# EAGLE board new_ATmega1280_breakout (EAGLE 5.11)
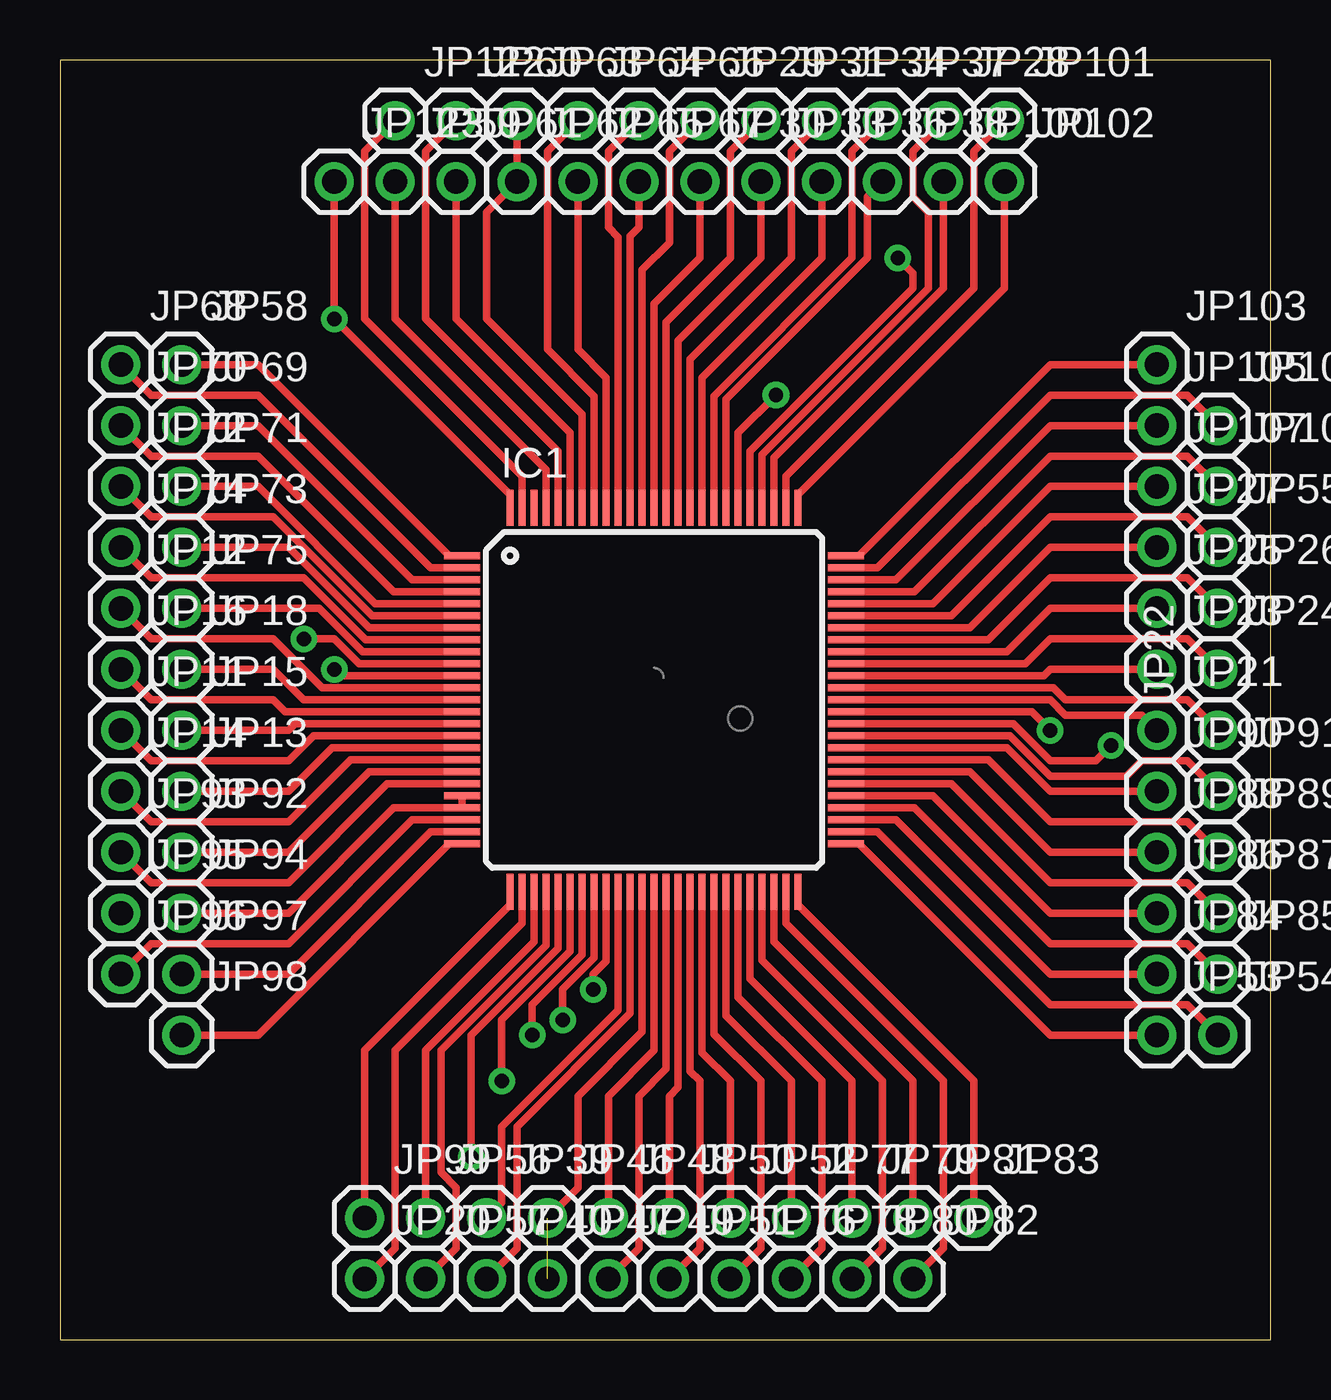
[diagram p0: board, top side]
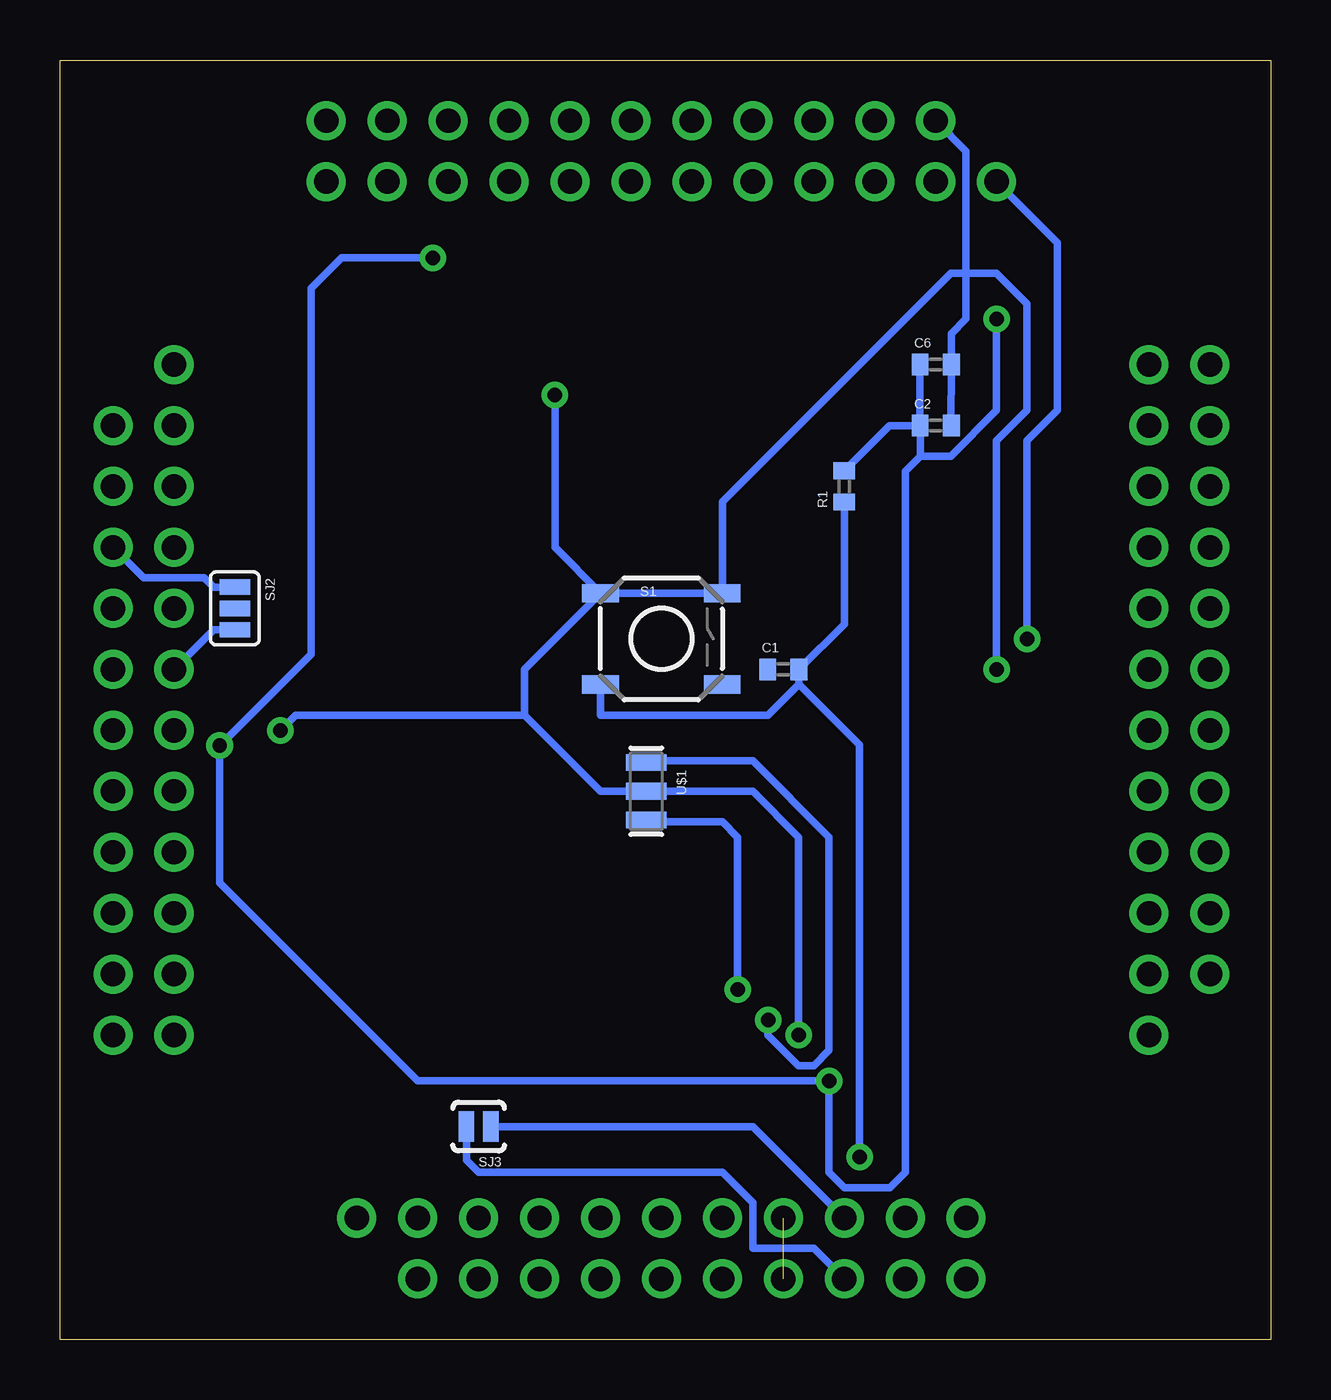
[diagram p1: board, bottom side, seen from below]

Size 50.47 x 53.33 mm. Coordinates in mm from the lower left corner, seen from the top.
Outline: 0,0 50.47,0 50.47,53.33 0,53.33 0,0
Copper layers (1*16): Top 0.035mm / dielectric 1.5mm / Bottom 0.035mm
Design rules "SparkFun": minimum track width 8mil, minimum drill 20mil, track to track 8mil, track to pad 8mil, pad to pad 8mil, via to via 8mil, smd to smd 8mil, copper to edge 10mil, drill to drill 8mil, minimum pad ring 12mil, minimum via ring 10mil, stop-mask expansion 4mil, vias tented up to drill 25mil, thermal gap 10mil

## Footprints (pad centres in the part's own frame; a part is rotated, then mirrored left to right if it is on the bottom)
C0402 = smd 0.7 x 0.9: 1 -0.65,0; 2 0.65,0
TQFP100 = smd 1.5 x 0.3: 1 -8,6; 2 -8,5.5; 3 -8,5; 4 -8,4.5; 5 -8,4; 6 -8,3.5; 7 -8,3; 8 -8,2.5; 9 -8,2; 10 -8,1.5; 11 -8,1; 12 -8,0.5; 13 -8,0; 14 -8,-0.5; 15 -8,-1; 16 -8,-1.5; 17 -8,-2; 18 -8,-2.5; 19 -8,-3; 20 -8,-3.5; 21 -8,-4; 22 -8,-4.5; 23 -8,-5; 24 -8,-5.5; 25 -8,-6; 51 8,-6; 52 8,-5.5; 53 8,-5; 54 8,-4.5; 55 8,-4; 56 8,-3.5; 57 8,-3; 58 8,-2.5; 59 8,-2; 60 8,-1.5; 61 8,-1; 62 8,-0.5; 63 8,0; 64 8,0.5; 65 8,1; 66 8,1.5; 67 8,2; 68 8,2.5; 69 8,3; 70 8,3.5; 71 8,4; 72 8,4.5; 73 8,5; 74 8,5.5; 75 8,6 | smd 0.3 x 1.5: 26 -6,-8; 27 -5.5,-8; 28 -5,-8; 29 -4.5,-8; 30 -4,-8; 31 -3.5,-8; 32 -3,-8; 33 -2.5,-8; 34 -2,-8; 35 -1.5,-8; 36 -1,-8; 37 -0.5,-8; 38 0,-8; 39 0.5,-8; 40 1,-8; 41 1.5,-8; 42 2,-8; 43 2.5,-8; 44 3,-8; 45 3.5,-8; 46 4,-8; 47 4.5,-8; 48 5,-8; 49 5.5,-8; 50 6,-8; 76 6,8; 77 5.5,8; 78 5,8; 79 4.5,8; 80 4,8; 81 3.5,8; 82 3,8; 83 2.5,8; 84 2,8; 85 1.5,8; 86 1,8; 87 0.5,8; 88 0,8; 89 -0.5,8; 90 -1,8; 91 -1.5,8; 92 -2,8; 93 -2.5,8; 94 -3,8; 95 -3.5,8; 96 -4,8; 97 -4.5,8; 98 -5,8; 99 -5.5,8; 100 -6,8
1X01 = drill 1.016 round: 1 0,0
TACTILE_SWITCH_SMD = smd 1.524 x 0.762: 1 -2.54,1.905; 2 2.54,1.905; 3 -2.54,-1.905; 4 2.54,-1.905
SJ_3 = smd 0.635 x 1.27: 1 -0.889,0; 2 0,0; 3 0.889,0
SJ_2S-NOTRACE = smd 0.635 x 1.27: 1 -0.508,0; 2 0.508,0
RESONATOR-SMD = smd 0.7 x 1.7: 1 -1.2,0; 2 0,0; 3 1.2,0

## Placement (x,y rotation side)
C1  .1uF  [C0402]  20.32,27.94 0 bottom
C2  .1uF  [C0402]  13.97,38.1 0 bottom
C6  .1uF  [C0402]  13.97,40.64 0 bottom
IC1  ATMEGA1280-16AU  [TQFP100]  24.77,26.67 0 top
JP11  M01PTH  [1X01]  2.54,25.4 0 top
JP12  M01PTH  [1X01]  2.54,30.48 0 top
JP13  M01PTH  [1X01]  5.08,22.86 0 top
JP14  M01PTH  [1X01]  2.54,22.86 0 top
JP15  M01PTH  [1X01]  5.08,25.4 0 top
JP16  M01PTH  [1X01]  2.54,27.94 0 top
JP18  M01PTH  [1X01]  5.08,27.94 0 top
JP20  M01PTH  [1X01]  12.7,2.54 0 top
JP21  M01PTH  [1X01]  45.72,25.4 0 top
JP22  M01PTH  [1X01]  48.26,25.4 90 top
JP23  M01PTH  [1X01]  45.72,27.94 0 top
JP24  M01PTH  [1X01]  48.26,27.94 0 top
JP25  M01PTH  [1X01]  45.72,30.48 0 top
JP26  M01PTH  [1X01]  48.26,30.48 0 top
JP27  M01PTH  [1X01]  45.72,33.02 0 top
JP28  M01PTH  [1X01]  36.83,50.8 0 top
JP29  M01PTH  [1X01]  26.67,50.8 0 top
JP30  M01PTH  [1X01]  26.67,48.26 0 top
JP31  M01PTH  [1X01]  29.21,50.8 0 top
JP33  M01PTH  [1X01]  29.21,48.26 0 top
JP34  M01PTH  [1X01]  31.75,50.8 0 top
JP36  M01PTH  [1X01]  31.75,48.26 0 top
JP37  M01PTH  [1X01]  34.29,50.8 0 top
JP38  M01PTH  [1X01]  34.29,48.26 0 top
JP39  M01PTH  [1X01]  17.78,5.08 0 top
JP40  M01PTH  [1X01]  17.78,2.54 0 top
JP46  M01PTH  [1X01]  20.32,5.08 0 top
JP47  M01PTH  [1X01]  20.32,2.54 0 top
JP48  M01PTH  [1X01]  22.86,5.08 0 top
JP49  M01PTH  [1X01]  22.86,2.54 0 top
JP50  M01PTH  [1X01]  25.4,5.08 0 top
JP51  M01PTH  [1X01]  25.4,2.54 0 top
JP52  M01PTH  [1X01]  27.94,5.08 0 top
JP53  M01PTH  [1X01]  45.72,12.7 0 top
JP54  M01PTH  [1X01]  48.26,12.7 0 top
JP55  M01PTH  [1X01]  48.26,33.02 0 top
JP56  M01PTH  [1X01]  15.24,5.08 0 top
JP57  M01PTH  [1X01]  15.24,2.54 0 top
JP58  M01PTH  [1X01]  5.08,40.64 0 top
JP59  M01PTH  [1X01]  13.97,48.26 0 top
JP60  M01PTH  [1X01]  16.51,50.8 0 top
JP61  M01PTH  [1X01]  16.51,48.26 0 top
JP62  M01PTH  [1X01]  19.05,48.26 0 top
JP63  M01PTH  [1X01]  19.05,50.8 0 top
JP64  M01PTH  [1X01]  21.59,50.8 0 top
JP65  M01PTH  [1X01]  21.59,48.26 0 top
JP66  M01PTH  [1X01]  24.13,50.8 0 top
JP67  M01PTH  [1X01]  24.13,48.26 0 top
JP68  M01PTH  [1X01]  2.54,40.64 0 top
JP69  M01PTH  [1X01]  5.08,38.1 0 top
JP70  M01PTH  [1X01]  2.54,38.1 0 top
JP71  M01PTH  [1X01]  5.08,35.56 0 top
JP72  M01PTH  [1X01]  2.54,35.56 0 top
JP73  M01PTH  [1X01]  5.08,33.02 0 top
JP74  M01PTH  [1X01]  2.54,33.02 0 top
JP75  M01PTH  [1X01]  5.08,30.48 0 top
JP76  M01PTH  [1X01]  27.94,2.54 0 top
JP77  M01PTH  [1X01]  30.48,5.08 0 top
JP78  M01PTH  [1X01]  30.48,2.54 0 top
JP79  M01PTH  [1X01]  33.02,5.08 0 top
JP80  M01PTH  [1X01]  33.02,2.54 0 top
JP81  M01PTH  [1X01]  35.56,5.08 0 top
JP82  M01PTH  [1X01]  35.56,2.54 0 top
JP83  M01PTH  [1X01]  38.1,5.08 0 top
JP84  M01PTH  [1X01]  45.72,15.24 0 top
JP85  M01PTH  [1X01]  48.26,15.24 0 top
JP86  M01PTH  [1X01]  45.72,17.78 0 top
JP87  M01PTH  [1X01]  48.26,17.78 0 top
JP88  M01PTH  [1X01]  45.72,20.32 0 top
JP89  M01PTH  [1X01]  48.26,20.32 0 top
JP90  M01PTH  [1X01]  45.72,22.86 0 top
JP91  M01PTH  [1X01]  48.26,22.86 0 top
JP92  M01PTH  [1X01]  5.08,20.32 0 top
JP93  M01PTH  [1X01]  2.54,20.32 0 top
JP94  M01PTH  [1X01]  5.08,17.78 0 top
JP95  M01PTH  [1X01]  2.54,17.78 0 top
JP96  M01PTH  [1X01]  2.54,15.24 0 top
JP97  M01PTH  [1X01]  5.08,15.24 0 top
JP98  M01PTH  [1X01]  5.08,12.7 0 top
JP99  M01PTH  [1X01]  12.7,5.08 0 top
JP100  M01PTH  [1X01]  36.83,48.26 0 top
JP101  M01PTH  [1X01]  39.37,50.8 0 top
JP102  M01PTH  [1X01]  39.37,48.26 0 top
JP103  M01PTH  [1X01]  45.72,40.64 0 top
JP104  M01PTH  [1X01]  48.26,38.1 0 top
JP105  M01PTH  [1X01]  45.72,38.1 0 top
JP106  M01PTH  [1X01]  48.26,35.56 0 top
JP107  M01PTH  [1X01]  45.72,35.56 0 top
JP122  M01PTH  [1X01]  13.97,50.8 0 top
JP123  M01PTH  [1X01]  11.43,48.26 0 top
R1  10k  [C0402]  17.78,35.56 90 bottom
S1  [TACTILE_SWITCH_SMD]  25.4,29.21 0 bottom
SJ2  [SJ_3]  43.18,30.48 270 bottom
SJ3  SOLDERJUMPERNC3  [SJ_2S-NOTRACE]  33.02,8.89 180 bottom
U$1  16MHZ  [RESONATOR-SMD]  26.04,22.86 270 bottom

## Library data of the parts
C1 C2 C6 JP11-JP16 JP18 JP20-JP31 JP33 JP34 JP36-JP40 JP46-JP107 JP122 JP123 R1 S1 SJ2 SJ3 U$1 = DIYdrones3
IC1 = atmel-2010

## Nets
#RST: C1.1
AREF: IC1.98
GND: C2.2 C6.2 IC1.11 IC1.32 IC1.62 IC1.81 IC1.99 JP122.1 S1.1 S1.2 U$1.2
MUX: IC1.1 JP58.1
N$12: SJ2.2
N$56: IC1.34 U$1.3
N$89: IC1.33 U$1.1
PA0: IC1.78 JP100.1
PA1: IC1.77 JP101.1
PA2: IC1.76 JP102.1
PA3: IC1.75 JP103.1
PA4: IC1.74 JP104.1
PA5: IC1.73 JP105.1
PA6: IC1.72 JP106.1
PA7: IC1.71 JP107.1
PB0: IC1.19 JP92.1
PB1: IC1.20 JP93.1
PB2: IC1.21 IC1.22 JP94.1
PB4: IC1.23 JP96.1
PB5: IC1.24 JP97.1
PB6: IC1.25 JP98.1
PB7: IC1.26 JP99.1
PC0: IC1.53 JP84.1
PC1: IC1.54 JP85.1
PC2: IC1.55 JP86.1
PC3: IC1.56 JP87.1
PC4: IC1.57 JP88.1
PC5: IC1.58 JP89.1
PC6: IC1.59 JP90.1
PC7: IC1.60 JP91.1
PD0: IC1.43 JP76.1
PD1: IC1.44 JP77.1
PD2: IC1.45 JP78.1
PD3: IC1.46 JP79.1
PD4: IC1.47 JP80.1
PD5: IC1.50 JP83.1
PD6: IC1.49 JP82.1
PD7: IC1.48 JP81.1
PE0: IC1.2 JP68.1
PE1: IC1.3 JP69.1
PE2: IC1.4 JP70.1
PE3: IC1.5 JP71.1
PE4: IC1.6 JP72.1
PE5: IC1.7 JP73.1
PE6: IC1.8 JP74.1
PE7: IC1.9 JP75.1
PF0: IC1.97 JP59.1
PF1: IC1.96 JP60.1
PF2: IC1.95 JP61.1
PF3: IC1.94 JP62.1 JP63.1
PF4: IC1.93 JP64.1
PF5: IC1.92 JP65.1
PF6: IC1.91 JP66.1
PF7: IC1.90 JP67.1
PG0: IC1.51 JP53.1
PG1: IC1.52 JP54.1
PG2: IC1.70 JP55.1 SJ2.1
PG3: IC1.28 JP56.1
PG4: IC1.29 JP57.1
PH0: IC1.12 JP12.1
PH1: IC1.13 JP18.1
PH2: IC1.14 JP16.1
PH3: IC1.15 JP15.1
PH4: IC1.16 JP11.1
PH5: IC1.17 JP13.1
PH6: IC1.18 JP14.1
PH7: IC1.27 JP20.1
PJ0: IC1.63 JP21.1
PJ1: IC1.64 JP22.1
PJ2: IC1.65 JP23.1 SJ2.3
PJ3: IC1.66 JP24.1
PJ4: IC1.67 JP25.1
PJ5: IC1.68 JP26.1
PJ6: IC1.69 JP27.1
PJ7: IC1.79 JP28.1
PK0: IC1.89 JP29.1
PK1: IC1.88 JP30.1
PK2: IC1.87 JP31.1
PK3: IC1.86 JP33.1
PK4: IC1.85 JP34.1
PK5: IC1.84 JP36.1
PK6: IC1.83 JP37.1
PK7: IC1.82 JP38.1
PL0: IC1.35 JP39.1 SJ3.1
PL1: IC1.36 JP40.1 SJ3.2
PL2: IC1.37 JP46.1 JP47.1
PL3: IC1.38 JP48.1
PL4: IC1.39 JP49.1
PL5: IC1.40 JP50.1
PL6: IC1.41 JP51.1
PL7: IC1.42 JP52.1
RST: C1.2 IC1.30 R1.1 S1.3
VCC: C2.1 C6.1 IC1.10 IC1.31 IC1.61 IC1.80 IC1.100 JP123.1 R1.2

## Tracks (layer width: path | path; a pad name or v marks a point on that pad's centre or on a via)
GND  (via drill 0.6)
  Top 0.305: IC1.99 19.27,35.98 12.7,42.55 12.7,49.53 JP122.1 | IC1.32 21.77,16.05 19.68,13.97 v19.68,12.7 | IC1.11 11.7,27.67 v11.43,27.94 | IC1.62 40.51,26.17 v41.28,25.4 | IC1.81 28.27,37.79 v29.84,39.37
  Bottom 0.305: C2.2 13.33,38.1 C6.2 13.32,41.93 12.7,42.55 12.7,44.45 | S1.1 S1.2 22.86,34.93 13.33,44.45 12.7,44.45 | 12.7,44.45 12.7,49.53 JP122.1 | v19.68,12.7 19.68,20.95 21.59,22.86 U$1.2 27.94,22.86 31.11,26.04 | v11.43,27.94 11.43,37.47 10.16,38.74 10.16,43.18 11.43,44.45 12.7,44.45 | v41.28,25.4 40.64,26.04 31.11,26.04 | 31.11,26.04 31.11,27.94 S1.1 | v29.84,39.37 29.84,33.02 S1.1
MUX
  Top 0.305: IC1.1 16.23,32.67 8.26,40.64 JP58.1
N$56  (via drill 0.6)
  Top 0.305: IC1.34 22.77,15.78 22.22,15.24 v22.22,14.61
  Bottom 0.305: v22.22,14.61 22.22,20.95 22.86,21.59 25.96,21.59 U$1.3
N$89  (via drill 0.6)
  Top 0.305: IC1.33 22.27,15.91 20.95,14.61 v20.95,13.33
  Bottom 0.305: v20.95,13.33 20.95,12.7 19.68,11.43 19.05,11.43 18.41,12.06 18.41,20.95 21.59,24.13 25.96,24.13 U$1.1
PA0
  Top 0.305: IC1.78 29.77,36.75 36.83,43.82 JP100.1
PA1
  Top 0.305: IC1.77 30.27,35.98 38.1,43.82 38.1,49.53 JP101.1
PA2
  Top 0.305: IC1.76 30.77,35.21 39.37,43.82 JP102.1
PA3
  Top 0.305: IC1.75 33.3,32.67 41.28,40.64 JP103.1
PA4
  Top 0.305: IC1.74 34.08,32.17 41.28,39.37 46.99,39.37 JP104.1
PA5
  Top 0.305: IC1.73 34.85,31.67 41.28,38.1 JP105.1
PA6
  Top 0.305: IC1.72 35.62,31.17 41.28,36.83 46.99,36.83 JP106.1
PA7
  Top 0.305: IC1.71 36.39,30.67 41.28,35.56 JP107.1
PB0
  Top 0.305: IC1.19 12.88,23.67 9.53,20.32 JP92.1
PB1
  Top 0.305: IC1.20 13.64,23.17 9.53,19.05 3.81,19.05 JP93.1
PB2
  Top 0.305: JP94.1 9.53,17.78 13.91,22.17 IC1.22 IC1.21
PB4
  Top 0.305: IC1.23 14.68,21.67 9.53,16.51 3.81,16.51 JP96.1
PB5
  Top 0.305: IC1.24 15.46,21.17 9.53,15.24 JP97.1
PB6
  Top 0.305: IC1.25 16.23,20.67 8.26,12.7 JP98.1
PB7
  Top 0.305: IC1.26 18.77,18.13 12.7,12.06 JP99.1
PC0
  Top 0.305: IC1.53 34.85,21.67 41.28,15.24 JP84.1
PC1
  Top 0.305: IC1.54 35.62,22.17 41.28,16.51 46.99,16.51 JP85.1
PC2
  Top 0.305: IC1.55 36.39,22.67 41.28,17.78 JP86.1
PC3
  Top 0.305: IC1.56 37.16,23.17 41.28,19.05 46.99,19.05 JP87.1
PC4
  Top 0.305: IC1.57 37.93,23.67 41.28,20.32 JP88.1
PC5
  Top 0.305: IC1.58 38.7,24.17 41.28,21.59 46.99,21.59 JP89.1
PC6
  Top 0.305: IC1.59 39.47,24.67 41.28,22.86 JP90.1
PC7
  Top 0.305: IC1.60 39.6,25.17 41.28,23.5 44.45,23.5 45.09,24.13 46.99,24.13 JP91.1
PD0
  Top 0.305: IC1.43 27.27,12.74 29.21,10.79 29.21,3.81 JP76.1
PD1
  Top 0.305: IC1.44 27.77,13.51 30.48,10.79 JP77.1
PD2
  Top 0.305: IC1.45 28.27,14.28 31.75,10.79 31.75,3.81 JP78.1
PD3
  Top 0.305: IC1.46 28.77,15.05 33.02,10.79 JP79.1
PD4
  Top 0.305: IC1.47 29.27,15.82 34.29,10.79 34.29,3.81 JP80.1
PD5
  Top 0.305: IC1.50 30.77,18.13 38.1,10.79 JP83.1
PD6
  Top 0.305: IC1.49 30.27,17.36 36.83,10.79 36.83,3.81 JP82.1
PD7
  Top 0.305: IC1.48 29.77,16.59 35.56,10.79 JP81.1
PE0
  Top 0.305: IC1.2 15.46,32.17 8.26,39.37 3.81,39.37 JP68.1
PE1
  Top 0.305: IC1.3 14.68,31.67 8.26,38.1 JP69.1
PE2
  Top 0.305: IC1.4 13.91,31.17 8.26,36.83 3.81,36.83 JP70.1
PE3
  Top 0.305: IC1.5 13.14,30.67 8.26,35.56 JP71.1
PE4
  Top 0.305: IC1.6 13.01,30.17 8.89,34.29 3.81,34.29 JP72.1
PE5
  Top 0.305: IC1.7 12.88,29.67 9.53,33.02 JP73.1
PE6
  Top 0.305: IC1.8 12.74,29.17 10.16,31.75 3.81,31.75 JP74.1
PE7
  Top 0.305: IC1.9 12.61,28.67 10.79,30.48 JP75.1
PF0
  Top 0.305: IC1.97 20.27,36.25 13.97,42.55 JP59.1
PF1
  Top 0.305: IC1.96 20.77,37.02 15.24,42.55 15.24,49.53 JP60.1
PF2
  Top 0.305: IC1.95 21.27,37.79 16.51,42.55 JP61.1
PF3
  Top 0.305: IC1.94 21.77,38.56 17.78,42.55 17.78,46.99 JP62.1 JP63.1
PF4
  Top 0.305: IC1.93 22.27,39.33 20.32,41.28 20.32,49.53 JP64.1
PF5
  Top 0.305: IC1.92 22.77,40.1 21.59,41.28 JP65.1
PF6
  Top 0.305: IC1.91 23.27,45.95 22.86,46.36 22.86,49.53 JP66.1
PF7
  Top 0.305: IC1.90 23.77,45.99 24.13,46.36 JP67.1
PG0
  Top 0.305: IC1.51 33.3,20.67 41.28,12.7 JP53.1
PG1
  Top 0.305: IC1.52 34.08,21.17 41.28,13.97 46.99,13.97 JP54.1
PG2
  Top 0.305: IC1.70 37.16,30.17 41.28,34.29 46.99,34.29 JP55.1
  Bottom 0.305: SJ2.1 44.07,31.37 44.45,31.75 46.99,31.75 JP55.1
PG3
  Top 0.305: IC1.28 19.77,16.59 15.24,12.06 JP56.1
PG4
  Top 0.305: IC1.29 20.27,16.46 15.88,12.06 15.88,6.98 16.51,6.35 16.51,3.81 JP57.1
PH0
  Top 0.305: IC1.12 10.93,27.17 8.89,29.21 3.81,29.21 JP12.1
PH1
  Top 0.305: IC1.13 10.16,26.67 8.89,27.94 JP18.1
PH2
  Top 0.305: IC1.14 9.39,26.17 8.89,26.67 3.81,26.67 JP16.1
PH3
  Top 0.305: IC1.15 9.79,25.67 9.53,25.4 JP15.1
PH4
  Top 0.305: IC1.16 10.56,25.17 9.53,24.13 3.81,24.13 JP11.1
PH5
  Top 0.305: IC1.17 11.33,24.67 9.53,22.86 JP13.1
PH6
  Top 0.305: IC1.18 12.11,24.17 9.53,21.59 3.81,21.59 JP14.1
PH7
  Top 0.305: IC1.27 19.27,17.36 13.97,12.06 13.97,3.81 JP20.1
PJ0
  Top 0.305: IC1.63 41.28,26.67 41.91,26.04 45.09,26.04 JP21.1
PJ1
  Top 0.305: IC1.64 41.41,27.17 41.91,26.67 46.99,26.67 JP22.1
PJ2
  Top 0.305: IC1.65 41.01,27.67 41.28,27.94 JP23.1
  Bottom 0.305: SJ2.3 44.07,29.59 JP23.1
PJ3
  Top 0.305: IC1.66 40.24,28.17 41.28,29.21 46.99,29.21 JP24.1
PJ4
  Top 0.305: IC1.67 39.47,28.67 41.28,30.48 JP25.1
PJ5
  Top 0.305: IC1.68 38.7,29.17 41.28,31.75 46.99,31.75 JP26.1
PJ6
  Top 0.305: IC1.69 37.93,29.67 41.28,33.02 JP27.1
PJ7
  Top 0.305: IC1.79 29.27,36.89 36.2,43.82 36.2,46.99 35.56,47.62 35.56,49.53 JP28.1
PK0
  Top 0.305: IC1.89 24.27,44.59 25.4,45.72 25.4,49.53 JP29.1
PK1
  Top 0.305: IC1.88 24.77,43.18 26.67,45.09 JP30.1
PK2
  Top 0.305: IC1.87 25.27,42.41 27.94,45.09 27.94,49.53 JP31.1
PK3
  Top 0.305: IC1.86 25.77,41.64 29.21,45.09 JP33.1
PK4
  Top 0.305: IC1.85 26.27,40.87 30.48,45.09 30.48,49.53 JP34.1
PK5
  Top 0.305: IC1.84 26.77,40.1 31.75,45.09 JP36.1
PK6
  Top 0.305: IC1.83 27.27,39.33 33.02,45.09 33.02,49.53 JP37.1
PK7
  Top 0.305: IC1.82 27.77,39.2 33.66,45.09 33.66,47.62 JP38.1
PL0
  Top 0.305: IC1.35 23.27,13.74 18.41,8.89 18.41,5.71 JP39.1
  Bottom 0.305: SJ3.1 21.59,8.89 JP39.1
PL1
  Top 0.305: IC1.36 23.77,13.61 19.05,8.89 19.05,3.81 JP40.1
  Bottom 0.305: SJ3.2 33.53,7.49 33.02,6.98 22.86,6.98 21.59,5.71 21.59,3.81 19.05,3.81 JP40.1
PL2  (1 unrouted)
  Top 0.305: IC1.37 24.27,12.83 21.59,10.16 21.59,6.35 JP46.1
PL3
  Top 0.305: IC1.38 24.77,12.06 22.86,10.16 JP48.1
PL4
  Top 0.305: IC1.39 25.27,11.29 24.13,10.16 24.13,3.81 JP49.1
PL5
  Top 0.305: IC1.40 25.77,10.53 25.4,10.16 JP50.1
PL6
  Top 0.305: IC1.41 26.27,11.2 26.67,10.79 26.67,3.81 JP51.1
PL7
  Top 0.305: IC1.42 26.77,11.97 27.94,10.79 JP52.1
RST  (via drill 0.6)
  Top 0.305: IC1.30 20.77,16.32 17.14,12.7 v17.14,7.62
  Bottom 0.305: R1.1 17.78,29.83 C1.2 19.67,27.32 | 19.67,27.32 20.95,26.04 27.94,26.04 S1.3 | v17.14,7.62 17.14,24.79 19.67,27.32
VCC  (via drill 0.6)
  Top 0.305: IC1.100 18.77,35.21 v11.43,42.55 JP123.1 | IC1.31 21.27,16.18 18.41,13.33 v18.41,10.79 | IC1.10 12.47,28.17 11.43,29.21 v10.16,29.21 | IC1.61 39.74,25.67 41.28,24.13 43.18,24.13 v43.82,24.77 | IC1.80 28.77,37.02 35.56,43.82 35.56,44.45 v34.93,45.09
  Bottom 0.305: C2.1 C6.1 | C2.1 15.89,38.1 R1.2 | v11.43,42.55 11.43,38.74 13.33,36.83 14.61,36.83 | 14.61,36.83 14.61,38.09 C2.1 | 14.61,36.83 15.24,36.2 15.24,6.98 15.88,6.35 17.78,6.35 18.41,6.98 v18.41,10.79 35.56,10.79 43.82,19.05 v43.82,24.77 40.01,28.57 40.01,43.82 38.74,45.09 v34.93,45.09 | v10.16,29.21 10.16,37.47 8.89,38.74 8.89,45.72 JP123.1